# Altium PCB RSD_M1_LED_TURN_RIGHT_V2.PcbDoc (part 1 of 2)
Units mm, origin at the board's own origin, x right, y up, seen from the top; angles counter-clockwise.
Board outline 79.22 x 29.59 mm, 2 copper layers (Top Layer, Bottom Layer), stack 0.871 mm thick; 29 components, 45 nets, 68 pads, 25 vias.
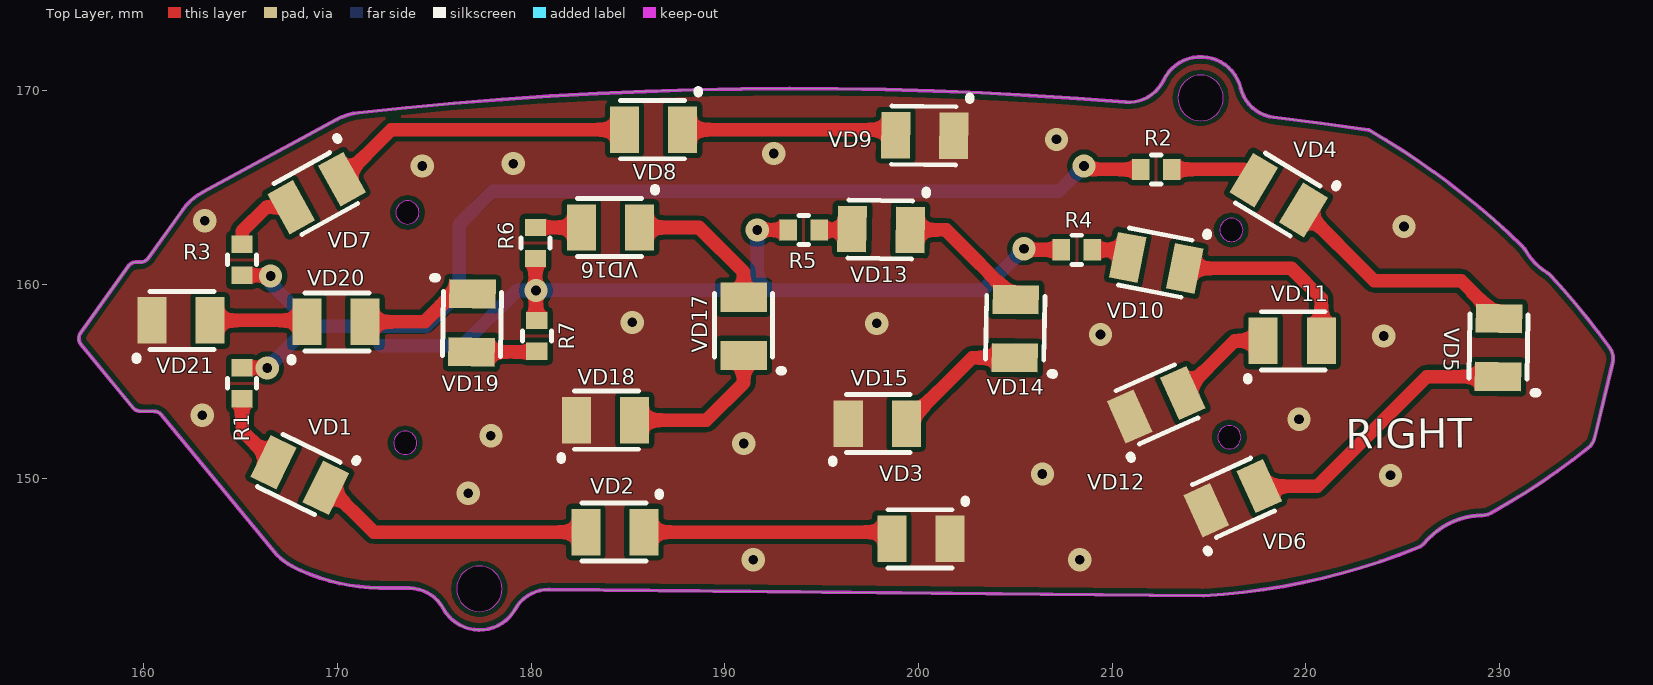
[diagram p0: Top Layer view]
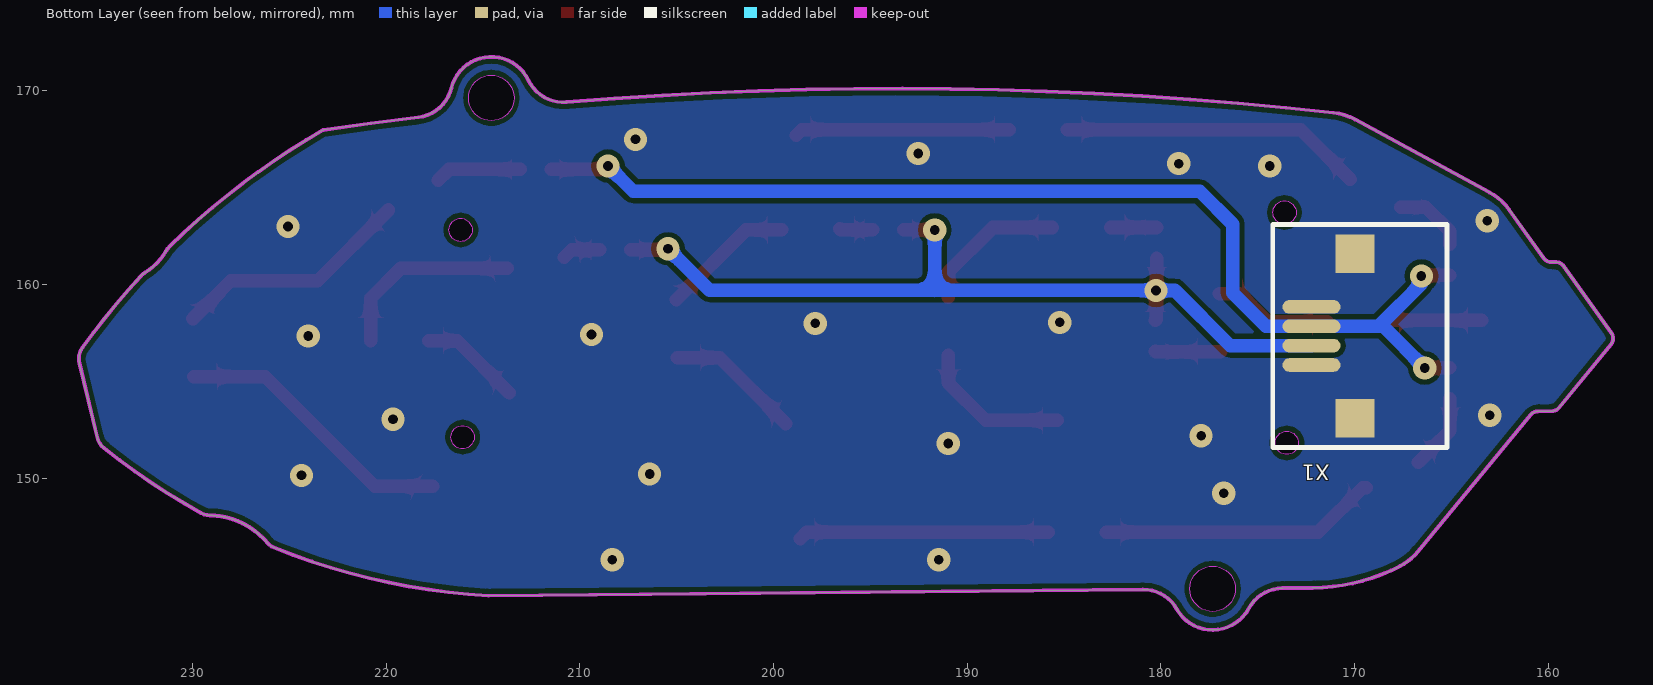
[diagram p1: Bottom Layer view, seen from below]
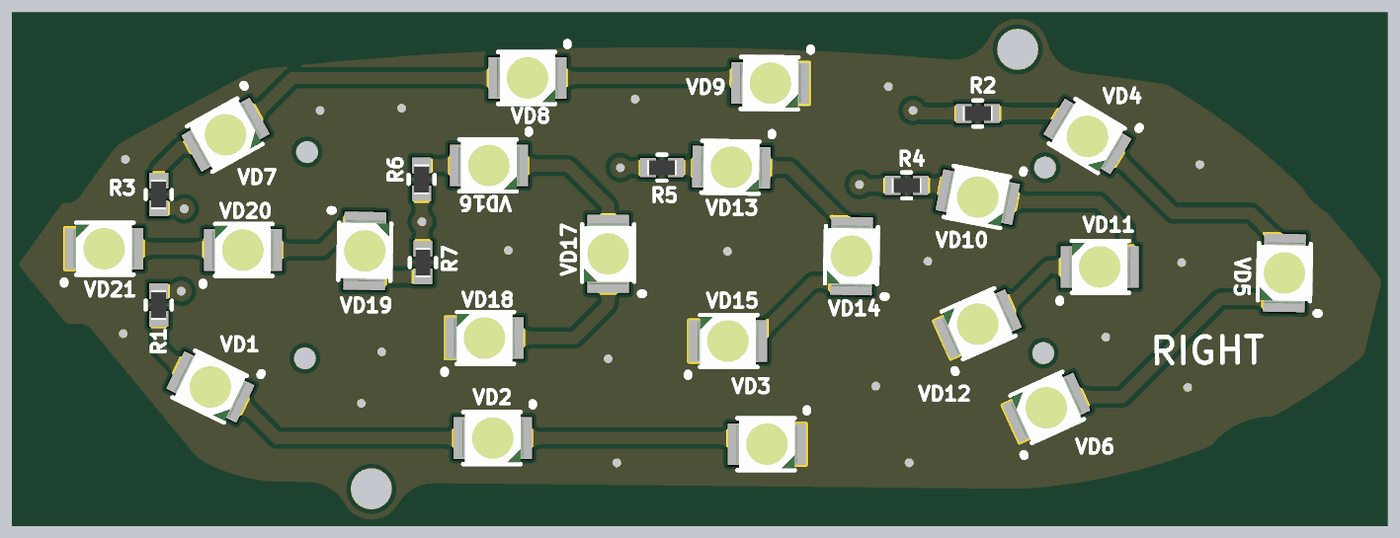
[diagram p3: 3D render of the assembled board from above, using the file's embedded part models]

## Layer stack, top to bottom
Top Solder: solder mask 0.0102, Solder Resist, Dk 3.5
Top Layer: signal copper 0.0356
Dielectric 1: dielectric 0.8, FR-4, Dk 4.8
Bottom Layer: signal copper 0.0356
Bottom Solder: solder mask 0.0102, Solder Resist, Dk 3.5

## Board outline
897 vertices, not listed, extent 156.65,142.168 235.87,171.761
cut-out: 215.457,152.123 ccw(c216.057,152.123) 216.057,151.523 ccw(c216.057,152.123) 216.657,152.123 ccw(c216.057,152.123) 216.057,152.723 ccw(c216.057,152.123)
cut-out: 215.56,162.823 ccw(c216.16,162.823) 216.16,162.223 ccw(c216.16,162.823) 216.76,162.823 ccw(c216.16,162.823) 216.16,163.423 ccw(c216.16,162.823)
cut-out: 213.4,169.638 ccw(c214.575,169.638) 214.575,168.463 ccw(c214.575,169.638) 215.75,169.638 ccw(c214.575,169.638) 214.575,170.813 ccw(c214.575,169.638)
cut-out: 176.156,144.293 ccw(c177.331,144.293) 177.331,143.118 ccw(c177.331,144.293) 178.506,144.293 ccw(c177.331,144.293) 177.331,145.468 ccw(c177.331,144.293)
cut-out: 172.903,151.83 ccw(c173.503,151.83) 173.503,151.23 ccw(c173.503,151.83) 174.103,151.83 ccw(c173.503,151.83) 173.503,152.43 ccw(c173.503,151.83)
cut-out: 173.016,163.729 ccw(c173.616,163.729) 173.616,163.129 ccw(c173.616,163.729) 174.216,163.729 ccw(c173.616,163.729) 173.616,164.329 ccw(c173.616,163.729)

## Design rules (kind name [scope] priority, off if disabled: settings)
Clearance [All] p1: gap=0.254 ignorepadtopadclearanceinfootprint=FALSE except(0: Arc-Hole Track-Hole SMDPad-Hole THPad-Hole Via-Hole Fill-Hole Poly-Hole Region-Hole Text-Hole)
PlaneConnect [All] p1: planeconnectstyle=Relief reliefexpansion=0.508 reliefentries=4 reliefconductorwidth=0.3 reliefairgap=0.254
PolygonConnect [All] p1: thpad.connectstyle=Relief thpad.reliefconductorwidth=0.5 thpad.reliefentries=4 thpad.polygonreliefangle="90 Angle" thpad.airgapwidth=0.3 smdpad.connectstyle=Direct smdpad.reliefconductorwidth=0.5 smdpad.reliefentries=4 smdpad.polygonreliefangle="90 Angle" smdpad.airgapwidth=0.3 via.connectstyle=Direct via.reliefconductorwidth=0.5 via.reliefentries=4 via.polygonreliefangle="90 Angle" via.airgapwidth=0.3
RoutingVias [All] p1: holewidth=0.711 width=1.27 viastyle="Through Hole" minholewidth=0.711 minwidth=1.27 maxholewidth=0.711 maxwidth=1.27
SolderMaskExpansion [All] p1: expansion=0.102
Width [All] p1: maxlimit=2 minlimit=0.254 preferedwidth=0.7
29 further rules are at their usual default settings.

## Components (designator, comment, footprint, x,y, rotation, side; value= is the part's Value field where it differs from the comment)
R1 "Resistor" Res0603 165.075,154.9 r90 top value="200 Om"
R2 "Resistor" Res0603 212.275,165.95 r180 top value="200 Om"
R3 "Resistor" Res0603 165.075,161.275 r270 top value="200 Om"
R4 "Resistor" Res0603 208.175,161.8 r180 top value="200 Om"
R5 "Resistor" Res0603 194.075,162.825 r180 top value="200 Om"
R6 "Resistor" Res0603 180.225,162.15 r270 top value="200 Om"
R7 "Resistor" Res0603 180.3,157.35 r90 top value="200 Om"
VD1 "LED" 3528_LED 168.05,150.175 r334 top value=WHITE
VD2 "LED" 3528_LED 184.325,147.225 r0 top value=WHITE
VD3 "LED" 3528_LED 200.125,146.875 r0 top value=WHITE
VD4 "LED" 3528_LED 218.6,164.625 r329 top value=WHITE
VD5 "LED" 3528_LED 229.95,156.75 r269 top value=WHITE
VD6 "LED" 3528_LED 216.225,148.975 r204.5 top value=WHITE
VD7 "LED" 3528_LED 168.925,164.725 r29 top value=WHITE
VD8 "LED" 3528_LED 186.325,168 r0 top value=WHITE
VD9 "LED" 3528_LED 200.325,167.7 r359.5 top value=WHITE
VD10 "LED" 3528_LED 212.275,161.125 r349 top value=YELLOW
VD11 "LED" 3528_LED 219.3,157.1 r180 top value=YELLOW
VD12 "LED" 3528_LED 212.275,153.8 r204 top value=YELLOW
VD13 "LED" 3528_LED 198.075,162.85 r359 top value=YELLOW
VD14 "LED" 3528_LED 204.999,157.725 r269 top value=YELLOW
VD15 "LED" 3528_LED 197.875,152.825 r180 top value=YELLOW
VD16 "LED" 3528_LED 184.1,162.95 r0 top value=YELLOW
VD17 "LED" 3528_LED 190.975,157.85 r270 top value=YELLOW
VD18 "LED" 3528_LED 183.85,153 r180 top value=YELLOW
VD19 "LED" 3528_LED 176.95,158.025 r89 top value=YELLOW
VD20 "LED" 3528_LED 169.925,158.075 r180 top value=YELLOW
VD21 "LED" 3528_LED 161.925,158.15 r180 top value=YELLOW
X1 "FPC_connector_4_1" FPC_4_1 169.225,157.35 r90 bottom value=0522070433

## Footprints (in the part's own frame and the unit in brackets; to place one, negate y for a bottom-side part, rotate by r counter-clockwise, add the part's x,y. Pads: shape width x height; smd on the part's side, far side on the other; paste and mask are expansions set on the pad)
3528_LED [mm]
  rect 1.5x2.4 smd: 1(1.5,0) 2(-1.5,0)
  silkscreen extent -1.7,-1.5 2.3,2, body extent -1.75,-1.4 1.75,1.4, height 1.9
FPC_4_1 [mm]
  rect 2x2 smd: 0(-4.25,0.75) 0(4.25,0.75)
  oval 0.7x3 smd: 1(-1.5,3) 2(-0.5,3) 3(0.5,3) 4(1.5,3)
  silkscreen extent -5.75,-4 5.75,5, body extent -5.15,-3.8 5.15,3.8, height 2.7
Res0603 [mm]
  rect 0.9x1.1 smd: 1(-0.8,0) 2(0.8,0)
  silkscreen extent -0.25,-0.75 0.25,0.75, body extent -0.85,-0.43 0.85,0.43, height 0.5

## Part data
X1: 1=GND, 2=GABARIT, 3=TURN, 4=GND

## Free pads (board coordinates)
  round 0 hole 1.25: 5(173.5,151.825) 5(173.625,163.725) 5(216.05,152.125) 5(216.15,162.825)
  round 0 hole 2.35: 5(177.325,144.3) 5(214.575,169.65)

## Via types
v1: diameter 1.2, hole 0.5, Top Layer to Bottom Layer, tented both sides, 25 vias

## Nets (pads, with @x,y where several pads share a name; then routed paths per layer and width w, separated by ;. In a path a pad name is that pad's centre, name@x,y a point inside that pad or via, vN(x,y) a via of type N, cw(c..) or ccw(c..) an arc to the next point about the centre after c; other vN are vias at no path point)
GABARIT: R1.2 R2.2 R3.2 X1.3 | length 57.9
  Top Layer w0.7: R1.2@165.075,155.7 v1(166.375,155.7) ; R3.2@165.075,160.475 v1@166.55,160.475 ; v1(208.55,166.125) 208.725,165.95 R2.2@211.475,165.95
  Bottom Layer w0.7: v1(166.375,155.7) 168.525,157.85 ; v1(166.55,160.45) 166.55,160.05 168.637,157.962 168.525,157.85 ; v1(208.55,166.125) 207.25,164.825 178,164.825 176.3,163.125 176.3,159.575 174.575,157.85 X1.3@172.225,157.85 168.525,157.85
GND: VD3.1 VD6.1 VD9.1 VD12.1 VD15.1 VD18.1 VD21.1 X1.0 X1.1 X1.4
  other v1: 191.475,145.8 208.325,145.8 176.75,149.225 224.375,150.15 206.4,150.225 190.975,151.8 177.925,152.2 219.65,153.05 163.025,153.25 224.025,157.35 209.4,157.425 197.85,158 185.225,158.05 225.075,163 163.15,163.3 174.375,166.125 179.075,166.25 192.525,166.775 207.125,167.5
NetR1_1: R1.1 VD1.2 | length 3.9
  Top Layer w0.7: R1.1@165.075,154.1 165.075,152.459 VD1.2@166.702,150.833
NetR2_1: R2.1 VD4.2 | length 4.5
  Top Layer w0.7: R2.1@213.075,165.95 216.762,165.95 VD4.2@217.314,165.398
NetR3_1: R3.1 VD7.2 | length 3.7
  Top Layer w0.7: R3.1@165.075,162.075 165.075,162.75 166.323,163.998 VD7.2@167.613,163.998
NetR4_1: R4.1 VD10.2 | length 2
  Top Layer w0.7: R4.1@208.975,161.8 210.414,161.8 VD10.2@210.803,161.411
NetR5_1: R5.1 VD13.2 | length 1.7
  Top Layer w0.7: R5.1@194.875,162.825 196.524,162.825 VD13.2@196.575,162.876
NetR6_1: R6.1 VD16.2 | length 2.4
  Top Layer w0.7: R6.1@180.225,162.95 VD16.2@182.6,162.95
NetR7_1: R7.1 VD19.2 | length 3.4
  Top Layer w0.7: VD19.2@176.924,156.525 180.275,156.525 R7.1@180.3,156.55
NetR8_1: 
NetR9_1: 
NetR10_1: 
NetR11_1: 
NetR12_1: 
NetR13_1: 
NetR14_1: 
NetVD1_1: VD1.1 VD2.2 | length 14.4
  Top Layer w0.7: VD1.1@169.398,149.517 169.583,149.517 171.875,147.225 VD2.2@182.825,147.225
NetVD2_1: VD2.1 VD3.2 | length 12.9
  Top Layer w0.7: VD2.1@185.825,147.225 198.275,147.225 VD3.2@198.625,146.875
NetVD4_1: VD4.1 VD5.2 | length 12.4
  Top Layer w0.7: VD4.1@219.886,163.852 223.538,160.2 228.026,160.2 VD5.2@229.976,158.25
NetVD5_1: VD5.1 VD6.2 | length 14.7
  Top Layer w0.7: VD6.2@217.59,149.597 220.597,149.597 226.25,155.25 VD5.1@229.924,155.25
NetVD7_1: VD7.1 VD8.2 | length 15.6
  Top Layer w0.7: VD7.1@170.237,165.452 172.785,168 VD8.2@184.825,168
NetVD8_1: VD8.1 VD9.2 | length 11.1
  Top Layer w0.7: VD8.1@187.825,168 198.538,168 VD9.2@198.825,167.713
NetVD10_1: VD10.1 VD11.2 | length 9.9
  Top Layer w0.7: VD10.1@213.747,160.839 219.261,160.839 220.8,159.3 VD11.2@220.8,157.1
NetVD11_1: VD11.1 VD12.2 | length 5.3
  Top Layer w0.7: VD12.2@213.645,154.41 216.335,157.1 VD11.1@217.8,157.1
NetVD13_1: VD13.1 VD14.2 | length 6.9
  Top Layer w0.7: VD13.1@199.575,162.824 201.426,162.824 VD14.2@205.025,159.225
NetVD14_1: VD14.1 VD15.2 | length 7
  Top Layer w0.7: VD15.2@199.375,152.825 202.775,156.225 VD14.1@204.973,156.225
NetVD16_1: VD16.1 VD17.2 | length 7.6
  Top Layer w0.7: VD16.1@185.6,162.95 188.675,162.95 190.975,160.65 VD17.2@190.975,159.35
NetVD17_1: VD17.1 VD18.2 | length 7.8
  Top Layer w0.7: VD18.2@185.35,153 189.05,153 190.975,154.925 VD17.1@190.975,156.35
NetVD19_1: VD19.1 VD20.2 | length 6.2
  Top Layer w0.7: VD20.2@171.425,158.075 174.5,158.075 175.95,159.525 VD19.1@176.976,159.525
NetVD20_1: VD20.1 VD21.2 | length 5
  Top Layer w0.7: VD21.2@163.425,158.15 168.35,158.15 VD20.1@168.425,158.075
NetVD22_1: 
NetVD23_1: 
NetVD25_1: 
NetVD26_1: 
NetVD28_1: 
NetVD29_1: 
NetVD31_1: 
NetVD32_1: 
NetVD34_1: 
NetVD35_1: 
NetVD37_1: 
NetVD38_1: 
NetVD40_1: 
NetVD41_1: 
TURN_SIGNAL: R4.2 R5.2 R6.2 R7.2 X1.2 | length 45.2
  Top Layer w0.7: R6.2@180.225,161.35 180.225,159.725 v1(180.25,159.7) 180.25,158.2 R7.2@180.3,158.15 ; v1(191.675,162.825) R5.2@193.275,162.825 ; v1(205.45,161.85) 205.5,161.8 R4.2@207.375,161.8
  Bottom Layer w0.7: X1.2@172.225,156.85 176.425,156.85 179.275,159.7 v1(180.25,159.7) 191.675,159.7 ; v1(191.675,162.825) 191.675,159.7 ; v1(205.45,161.85) 203.3,159.7 191.675,159.7

## Polygon pours and split planes (outlines as drawn)
GND on Bottom Layer "Top Layer, Top-No Net" (solid, pour order 17): 330 vertices, not listed, extent 156.6,141.994 236.121,171.887
GND on Top Layer "Top Layer, Top-No Net" (solid, pour order 15): 330 vertices, not listed, extent 156.5,142.044 236.021,171.937

## Keep-outs
Keep-Out Layer:
  lines w0.2: 156.743,157.517 cw(c156.866,157.43) 156.744,157.518 ; 156.743,157.517 cw(c156.865,157.429) 156.743,157.518 ; 156.743,157.517 ccw(c157.149,157.226) 156.762,156.91 ; 156.743,157.517 156.744,157.518 ; 156.744,157.518 159.196,160.951 ; 156.743,157.518 156.743,157.518 ; 156.743,157.518 156.744,157.518 ; 156.762,156.91 ccw(c156.878,157.005) 156.763,156.909 ; 156.763,156.909 ccw(c156.879,157.004) 156.763,156.908 ; 156.762,156.91 ccw(c157.149,157.226) 156.763,156.908 ; 156.763,156.909 ccw(c156.878,157.005) 156.763,156.909 ; 156.763,156.909 ccw(c156.878,157.005) 156.763,156.908 ; 156.762,156.91 156.762,156.91 ; 156.762,156.91 156.763,156.909 ; 156.763,156.908 ccw(c156.878,157.005) 156.763,156.908 ; 156.763,156.908 ccw(c156.879,157.004) 156.764,156.907 159.45,153.644 ; 156.763,156.908 156.763,156.908 ; 156.763,156.908 156.763,156.908 ; 159.196,160.951 cw(c159.319,160.864) 159.197,160.952 ; 159.196,160.951 159.197,160.952 ; 159.196,160.951 159.197,160.952 ; 159.197,160.952 cw(c159.321,160.866) 159.198,160.953 ; 159.197,160.952 ccw(c159.321,160.866) 159.197,160.952 ; 159.197,160.952 cw(c159.319,160.864) 159.198,160.953 ; 159.197,160.952 159.197,160.952 ; 159.197,160.952 159.198,160.954 ; 159.198,160.954 cw(c159.605,160.663) 159.2,160.956 ; 159.198,160.954 ccw(c159.321,160.866) 159.198,160.953 ; 159.198,160.953 ccw(c159.321,160.866) 159.198,160.953 ; 159.198,160.954 cw(c159.32,160.866) 159.2,160.956 ; 159.198,160.954 ccw(c159.319,160.864) 159.198,160.953 ; 159.198,160.954 159.2,160.956 ; 159.2,160.956 cw(c159.605,160.663) 159.608,161.163 ; 159.45,153.643 ccw(c159.566,153.739) 159.45,153.643 ; 159.45,153.644 ccw(c159.566,153.739) 159.45,153.644 ; 159.45,153.644 ccw(c159.567,153.738) 159.45,153.643 ; 159.45,153.643 ccw(c159.567,153.738) 159.451,153.643 ; 159.45,153.644 159.45,153.643 ; 159.45,153.644 159.451,153.643 ; 159.45,153.644 159.45,153.644 ; 159.451,153.643 cw(c159.567,153.738) 159.45,153.643 ; 159.451,153.643 cw(c159.566,153.739) 159.451,153.643 ; 159.451,153.643 ccw(c159.567,153.738) 159.451,153.643 ; 159.451,153.643 ccw(c159.837,153.96) 159.452,153.642 ; 159.452,153.642 ccw(c159.837,153.96) 159.83,153.46 ; 159.608,161.163 cw(c159.608,161.012) 159.61,161.163 ; 159.608,161.163 cw(c159.605,160.663) 159.61,161.163 ; 159.608,161.163 159.611,161.163 ; 159.61,161.163 ccw(c159.61,161.012) 159.61,161.163 ; 159.61,161.163 cw(c159.61,161.012) 159.611,161.163 ; 159.61,161.163 cw(c159.608,161.012) 159.611,161.163 ; 159.61,161.163 cw(c159.608,161.012) 159.611,161.163 ; 159.61,161.163 159.611,161.163 ; 159.61,161.163 159.61,161.163 ; 159.61,161.163 159.61,161.163 ; 159.611,161.163 ccw(c159.61,161.012) 159.611,161.163 ; 159.611,161.163 ccw(c159.608,161.012) 159.611,161.163 ; 159.611,161.163 cw(c159.61,161.012) 159.612,161.163 ; 159.611,161.163 159.612,161.163 ; 159.611,161.163 159.611,161.163 ; 159.611,161.163 159.612,161.163 ; 159.612,161.163 159.82,161.161 cw(c159.82,161.01) 159.822,161.161 ; 159.822,161.161 ccw(c159.826,161.661) 159.823,161.161 ; 159.822,161.161 ccw(c159.82,161.01) 159.822,161.161 ; 159.822,161.161 cw(c159.822,161.01) 159.823,161.161 ; 159.822,161.161 ccw(c159.826,161.661) 159.822,161.161 ; 159.822,161.161 ccw(c159.826,161.661) 159.822,161.161 ; 159.822,161.161 ccw(c159.822,161.01) 159.821,161.161 ; 159.822,161.161 ccw(c159.822,161.01) 159.822,161.161 ; 159.822,161.161 159.823,161.161 ; 159.822,161.161 159.822,161.161 ; 159.821,161.161 159.822,161.161 ; 159.823,161.161 ccw(c159.826,161.661) 160.233,161.37 ; 159.823,161.161 ccw(c159.826,161.661) 159.823,161.161 ; 159.823,161.161 ccw(c159.822,161.01) 159.823,161.161 ; 159.83,153.46 ccw(c159.837,153.96) 159.832,153.46 ; 159.83,153.46 ccw(c159.834,153.611) 159.832,153.46 ; 159.83,153.46 159.832,153.46 ; 159.832,153.46 ccw(c159.836,153.611) 159.832,153.46 ; 159.832,153.46 ccw(c159.834,153.611) 159.832,153.46 ; 159.832,153.46 ccw(c159.834,153.611) 159.832,153.46 ; 159.832,153.46 ccw(c159.837,153.96) 159.832,153.46 ; 159.832,153.46 ccw(c159.834,153.611) 159.834,153.46 ; 159.832,153.46 ccw(c159.836,153.611) 159.834,153.46 ; 159.832,153.46 159.832,153.46 ; 159.832,153.46 159.832,153.46 ; 159.832,153.46 159.832,153.46 ; 159.832,153.46 159.834,153.46 ; 159.834,153.46 ccw(c159.834,153.611) 159.834,153.46 ; 159.834,153.46 ccw(c159.836,153.611) 159.834,153.46 ; 159.834,153.46 159.834,153.46 ; 159.834,153.46 159.834,153.46 ; 159.834,153.46 ccw(c159.836,153.611) 159.835,153.46 ; 159.834,153.46 159.834,153.46 ; 159.834,153.46 159.835,153.46 ; 159.834,153.46 159.835,153.46 ; 159.835,153.46 160.54,153.454 ; 160.234,161.371 ccw(c160.356,161.283) 160.233,161.37 ; 160.234,161.371 162.021,163.872 ; 160.234,161.37 160.234,161.371 ; 160.233,161.37 160.234,161.37 ; 160.233,161.37 160.233,161.37 ; 160.233,161.37 160.234,161.371 ; 160.54,153.454 ccw(c160.542,153.604) 160.54,153.454 ; 160.54,153.454 160.54,153.454 ; 160.54,153.454 160.541,153.454 ; 160.54,153.454 ccw(c160.542,153.604) 160.541,153.454 ; 160.541,153.454 ccw(c160.536,152.954) 160.541,153.454 ; 160.54,153.454 ccw(c160.542,153.604) 160.541,153.454 ; 160.54,153.454 ccw(c160.542,153.604) 160.54,153.454 ; 160.541,153.454 ccw(c160.542,153.604) 160.542,153.454 ; 160.54,153.454 160.54,153.454 ; 160.54,153.454 160.54,153.454 ; 160.541,153.454 160.541,153.454 ; 160.54,153.454 160.54,153.454 ; 160.542,153.454 cw(c160.536,152.954) 160.922,153.272 ; 160.542,153.454 160.542,153.454 ; 160.922,153.271 ccw(c160.536,152.954) 160.922,153.272 ; 160.922,153.271 ccw(c161.038,153.367) 160.923,153.271 ; 160.922,153.271 cw(c161.038,153.367) 160.922,153.272 ; 160.922,153.271 160.922,153.271 160.923,153.271 ; 160.922,153.271 160.922,153.271 ; 160.922,153.271 160.922,153.272 ; 160.922,153.271 160.923,153.271 ; 160.923,153.271 166.723,146.222 ; 162.021,163.872 cw(c162.144,163.785) 162.021,163.872 ; 162.021,163.872 162.021,163.872 ; 162.021,163.872 162.021,163.873 ; 162.021,163.873 cw(c162.144,163.786) 162.022,163.873 ; 162.021,163.873 cw(c162.144,163.785) 162.022,163.873 ; 162.021,163.873 cw(c164.462,162.128) 162.022,163.873 ; 162.021,163.873 ccw(c162.144,163.785) 162.021,163.872 ; 162.021,163.872 ccw(c162.144,163.785) 162.021,163.872 ; 162.021,163.872 cw(c162.144,163.786) 162.021,163.873 ; 162.021,163.873 162.021,163.873 ; 162.021,163.872 162.021,163.873 ; 162.021,163.872 162.022,163.873 ; 162.021,163.872 162.021,163.872 ; 162.021,163.872 162.021,163.872 ; 162.021,163.872 162.021,163.872 ; 162.021,163.873 162.021,163.873 ; 162.022,163.874 cw(c164.462,162.128) 162.023,163.874 ; 162.022,163.874 ccw(c164.462,162.128) 162.022,163.873 ; 162.022,163.873 ccw(c162.144,163.785) 162.022,163.873 ; 162.022,163.873 cw(c162.144,163.786) 162.023,163.874 ; 162.022,163.873 ccw(c164.462,162.128) 162.022,163.873 ; 162.022,163.873 ccw(c162.144,163.786) 162.022,163.873 ; 162.022,163.873 ccw(c162.144,163.785) 162.022,163.873 ; 162.022,163.873 ccw(c162.144,163.786) 162.021,163.873 ; 162.022,163.873 162.022,163.873 ; 162.022,163.873 162.023,163.874 ; 162.022,163.873 162.022,163.873 ; 162.022,163.873 162.022,163.873 ; 162.022,163.873 162.022,163.873 ; 162.023,163.874 cw(c164.462,162.128) 163.032,164.765 ; 163.033,164.766 cw(c163.106,164.634) 163.033,164.766 ; 163.033,164.766 cw(c163.105,164.634) 163.034,164.766 ; 163.033,164.766 ccw(c163.105,164.634) 163.032,164.765 ; 163.033,164.766 ccw(c164.462,162.128) 163.032,164.765 ; 163.033,164.766 163.033,164.766 ; 163.033,164.766 163.034,164.767 ; 163.033,164.766 163.033,164.766 ; 163.032,164.765 163.034,164.767 ; 163.034,164.766 cw(c163.106,164.634) 163.034,164.767 ; 163.034,164.766 ccw(c163.106,164.634) 163.033,164.766 ; 163.034,164.766 cw(c163.105,164.634) 163.034,164.767 ; 163.033,164.766 cw(c163.105,164.634) 163.034,164.767 ; 163.034,164.767 169.984,168.533 cw(c170.056,168.401) 169.985,168.533 ; 163.034,164.767 163.034,164.767 ; 166.723,146.222 ccw(c166.84,146.317) 166.724,146.221 ; 166.723,146.222 166.724,146.222 166.724,146.221 ; 166.723,146.222 166.724,146.221 ; 166.725,146.22 ccw(c166.841,146.316) 166.725,146.22 ; 166.725,146.22 ccw(c169.04,148.128) 166.725,146.22 ; 166.725,146.22 cw(c166.841,146.316) 166.724,146.221 ; 166.725,146.22 cw(c166.84,146.317) 166.724,146.221 ; 166.725,146.22 cw(c169.04,148.128) 166.724,146.221 ; 166.725,146.22 ccw(c169.04,148.128) 167.659,145.464 ; 166.725,146.22 166.724,146.221 ; 166.725,146.22 166.725,146.22 ; 166.725,146.22 166.724,146.221 ; 166.724,146.221 ccw(c166.84,146.317) 166.724,146.221 ; 166.724,146.221 ccw(c166.84,146.317) 166.724,146.221 ; 166.724,146.221 ccw(c166.841,146.316) 166.724,146.221 ; 166.724,146.221 ccw(c166.841,146.316) 166.724,146.221 ; 166.724,146.221 166.724,146.221 ; 166.724,146.221 166.724,146.221 ; 166.724,146.221 166.724,146.221 ; 166.724,146.221 166.724,146.221 ; 167.659,145.465 ccw(c167.728,145.598) 167.659,145.464 ; 167.659,145.465 ccw(c167.73,145.597) 167.659,145.464 ; 167.659,145.464 ccw(c167.73,145.597) 167.66,145.464 ccw(c172.263,154.342) 172.167,144.342 ccw(c172.168,144.492) 172.167,144.342 ; 169.986,168.534 cw(c171.415,165.896) 169.987,168.534 cw(c171.415,165.896) 171.083,168.878 ; 169.986,168.534 ccw(c170.056,168.401) 169.986,168.534 ; 169.986,168.534 ccw(c170.056,168.401) 169.985,168.533 ; 171.083,168.878 cw(c171.415,165.896) 171.084,168.878 ; 171.083,168.878 cw(c171.1,168.728) 171.084,168.878 ; 171.083,168.878 171.084,168.878 ; 171.084,168.878 cw(c171.1,168.728) 171.084,168.878 ; 171.084,168.878 cw(c171.101,168.728) 171.084,168.878 ; 171.085,168.878 cw(c193.694,-34.872) 210.686,169.423 cw(c210.673,169.273) 210.686,169.423 ; 171.085,168.878 ccw(c171.101,168.728) 171.084,168.878 ; 171.084,168.878 ccw(c171.101,168.728) 171.084,168.878 ; 171.084,168.878 ccw(c171.101,168.728) 171.084,168.878 ; 172.167,144.342 ccw(c172.169,144.492) 172.167,144.342 ; 172.167,144.342 ccw(c172.168,144.492) 172.167,144.342 ; 172.167,144.342 ccw(c172.169,144.492) 172.167,144.342 ; 172.167,144.342 ccw(c172.168,144.492) 172.167,144.342 ; 172.168,144.342 ccw(c172.169,144.492) 172.168,144.342 ; 172.168,144.342 ccw(c172.169,144.492) 172.169,144.342 ; 172.167,144.342 ccw(c172.169,144.492) 172.168,144.342 ; 172.167,144.342 ccw(c172.168,144.492) 172.168,144.342 ; 172.167,144.342 172.167,144.342 ; 172.167,144.342 172.168,144.342 ; 172.168,144.342 172.168,144.342 ; 172.168,144.342 172.169,144.342 ; 172.168,144.342 172.168,144.342 ; 172.168,144.342 172.169,144.342 ; 172.169,144.342 173.722,144.327 ccw(c173.724,144.478) 173.723,144.327 ; 173.723,144.327 ccw(c173.725,144.478) 173.724,144.327 ; 173.724,144.327 cw(c173.704,142.327) 173.724,144.327 ; 173.724,144.327 ccw(c173.704,142.327) 173.723,144.327 ; 173.723,144.327 ccw(c173.724,144.478) 173.724,144.327 ; 173.724,144.327 ccw(c173.724,144.478) 173.725,144.327 ; 173.723,144.327 173.723,144.327 ; 173.724,144.327 ccw(c173.725,144.478) 173.725,144.327 ; 173.725,144.327 ccw(c173.704,142.327) 173.724,144.327 ; 173.725,144.327 cw(c173.704,142.327) 175.462,143.281 cw(c173.704,142.327) 175.463,143.28 ; 173.725,144.327 173.725,144.327 ; 173.725,144.327 173.725,144.327 ; 173.725,144.327 173.725,144.327 ; 175.463,143.28 cw(c173.704,142.327) 175.463,143.28 ; 175.463,143.28 ccw(c175.596,143.35) 175.463,143.28 ; 175.463,143.28 175.463,143.28 ; 175.463,143.279 cw(c175.596,143.35) 175.463,143.28 ; 175.463,143.279 ccw(c177.331,144.293) 179.179,143.244 ccw(c179.049,143.319) 179.18,143.245 ; 175.463,143.279 175.463,143.279 ; 175.463,143.28 175.463,143.28 ; 179.18,143.245 cw(c180.919,142.258) 180.938,144.258 ; 179.18,143.245 179.18,143.245 ; 180.938,144.258 ccw(c180.919,142.258) 180.938,144.258 ; 180.938,144.258 ccw(c180.919,142.258) 180.938,144.258 ; 180.938,144.258 ccw(c180.94,144.409) 180.939,144.258 ; 180.938,144.258 ccw(c180.941,144.409) 180.94,144.258 ; 180.938,144.258 ccw(c180.94,144.409) 180.938,144.258 ; 180.938,144.258 ccw(c180.941,144.409) 180.938,144.258 ; 180.938,144.258 ccw(c180.941,144.409) 180.938,144.258 ; 180.938,144.258 180.938,144.258 ; 180.938,144.258 180.938,144.258 ; 180.938,144.258 180.939,144.258 ; 180.939,144.258 ccw(c180.94,144.409) 180.94,144.258 ; 180.94,144.258 180.94,144.258 ; 180.94,144.258 180.94,144.258 ; 180.939,144.258 180.94,144.258 ; 180.94,144.258 214.724,143.936 ; 210.687,169.423 ccw(c210.852,171.416) 210.687,169.423 ccw(c210.852,171.416) 212.656,170.552 ; 210.687,169.423 ccw(c210.673,169.273) 210.686,169.423 ; 212.656,170.552 cw(c212.793,170.489) 212.657,170.554 ; 212.656,170.553 ccw(c210.852,171.416) 212.657,170.554 ; 212.656,170.552 ccw(c210.852,171.416) 212.656,170.553 ; 212.656,170.553 ccw(c212.792,170.488) 212.656,170.552 ; 212.656,170.553 cw(c212.792,170.488) 212.657,170.554 ; 212.656,170.552 212.656,170.552 ; 212.656,170.552 212.657,170.554 ; 212.656,170.552 212.657,170.554 ; 212.657,170.554 cw(c212.793,170.489) 212.657,170.554 ; 212.657,170.554 cw(c212.792,170.488) 212.657,170.554 ; 212.657,170.554 cw(c212.793,170.489) 212.658,170.556 ; 212.657,170.554 212.657,170.554 ; 212.657,170.554 212.658,170.556 ; 212.657,170.554 cw(c214.575,169.638) 212.658,170.556 ; 212.657,170.554 ccw(c212.792,170.488) 212.657,170.554 ; 212.657,170.554 ccw(c214.575,169.638) 212.657,170.554 ; 212.657,170.554 212.657,170.554 ; 212.658,170.556 cw(c214.575,169.638) 216.637,170.15 ; 214.724,143.936 ccw(c214.726,144.086) 214.734,143.936 ccw(c212.687,178.876) 225.771,146.414 ccw(c212.687,178.876) 225.772,146.414 ; 214.724,143.936 214.724,143.936 ; 214.724,143.936 214.724,143.936 ; 216.637,170.15 cw(c216.491,170.113) 216.638,170.147 ; 216.637,170.15 cw(c214.575,169.638) 216.637,170.149 ; 216.637,170.15 216.637,170.149 ; 216.638,170.147 ccw(c218.579,170.627) 218.337,168.642 cw(c218.32,168.492) 218.338,168.642 218.339,168.642 ; 216.638,170.147 ccw(c218.579,170.627) 216.638,170.147 ; 216.638,170.148 ccw(c218.579,170.627) 216.638,170.147 ; 216.638,170.148 cw(c218.579,170.627) 216.638,170.148 ; 216.638,170.147 ccw(c216.492,170.112) 216.638,170.148 ; 216.638,170.148 ccw(c216.492,170.112) 216.638,170.148 ; 216.638,170.148 216.638,170.148 ; 218.34,168.641 cw(c193.694,-34.872) 223.231,167.989 cw(c223.209,167.841) 223.284,167.971 cw(c203.238,133.356) 231.185,161.974 ; 218.34,168.641 ccw(c218.321,168.492) 218.339,168.642 ; 218.34,168.641 218.34,168.641 ; 225.772,146.414 ccw(c225.398,147.343) 225.773,146.414 ccw(c225.398,147.343) 226.157,146.69 ; 225.772,146.414 225.772,146.414 ; 226.157,146.69 ccw(c226.044,146.79) 226.157,146.69 ; 226.157,146.69 ccw(c226.043,146.788) 226.159,146.692 ; 226.157,146.69 226.157,146.69 ; 226.159,146.692 ccw(c226.047,146.793) 226.159,146.692 ; 226.159,146.692 ccw(c226.047,146.793) 226.159,146.693 ; 226.159,146.693 ccw(c226.047,146.793) 226.159,146.693 ; 226.159,146.693 ccw(c226.047,146.793) 226.159,146.693 ; 226.159,146.692 226.159,146.692 ; 226.159,146.693 226.267,146.813 ccw(c226.155,146.913) 226.267,146.813 226.268,146.814 ccw(c226.156,146.914) 226.269,146.815 ; 226.269,146.815 226.269,146.815 ; 226.269,146.815 226.292,146.84 ; 226.292,146.84 ccw(c226.184,146.944) 226.292,146.84 ; 226.292,146.84 ccw(c226.184,146.944) 226.292,146.84 ; 226.292,146.84 ccw(c226.184,146.944) 226.292,146.84 ; 226.292,146.84 226.315,146.864 ; 226.315,146.864 ccw(c226.206,146.968) 226.315,146.864 ; 226.315,146.864 ccw(c226.206,146.968) 226.315,146.864 ; 226.315,146.864 ccw(c226.207,146.969) 226.315,146.864 ; 226.315,146.864 226.339,146.888 226.362,146.912 ; 226.362,146.912 ccw(c226.257,147.019) 226.363,146.913 ; 226.363,146.913 226.363,146.913 226.386,146.935 ccw(c226.28,147.042) 226.386,146.936 ; 226.386,146.936 ccw(c226.28,147.042) 226.386,146.936 ; 226.386,146.936 ccw(c226.281,147.044) 226.386,146.936 ; 226.386,146.936 ccw(c226.281,147.043) 226.386,146.936 ; 226.386,146.936 ccw(c226.28,147.042) 226.386,146.936 ; 226.386,146.936 ccw(c226.281,147.043) 226.386,146.936 ; 226.386,146.936 ccw(c226.28,147.042) 226.386,146.936 ; 226.386,146.936 ccw(c226.281,147.044) 226.386,146.936 ; 226.386,146.936 226.386,146.936 ; 226.386,146.936 226.386,146.936 ; 226.386,146.936 226.386,146.936 ; 226.386,146.936 226.386,146.936 ; 226.386,146.936 226.41,146.959 ; 226.41,146.959 ccw(c226.305,147.067) 226.41,146.96 ; 226.41,146.959 ccw(c226.305,147.067) 226.41,146.959 ; 226.41,146.959 226.41,146.96 ; 226.41,146.959 226.41,146.96 ; 226.41,146.96 226.411,146.96 ; 226.411,146.96 226.434,146.983 ; 226.434,146.983 ccw(c226.33,147.091) 226.434,146.983 226.459,147.006 ; 226.434,146.983 226.434,146.983 ; 226.434,146.983 226.434,146.983 ; 226.459,147.006 ccw(c226.357,147.116) 226.459,147.007 226.483,147.028 226.483,147.029 ; 226.459,147.006 226.459,147.006 ; 226.483,147.029 ccw(c226.381,147.139) 226.483,147.029 ; 226.483,147.029 ccw(c226.381,147.139) 226.483,147.029 ; 226.483,147.029 ccw(c226.381,147.139) 226.483,147.029 ; 226.483,147.029 ccw(c226.381,147.139) 226.484,147.029 ; 226.483,147.029 ccw(c226.381,147.139) 226.483,147.029 ; 226.483,147.029 ccw(c226.382,147.14) 226.484,147.029 ; 226.483,147.029 226.483,147.029 ; 226.483,147.029 226.484,147.029 ; 226.484,147.029 ccw(c226.382,147.14) 226.484,147.029 ; 226.484,147.029 226.508,147.051 226.508,147.051 226.508,147.052 ; 226.508,147.052 ccw(c226.407,147.163) 226.508,147.052 ; 226.508,147.052 ccw(c226.407,147.163) 226.508,147.052 ; 226.508,147.052 ccw(c226.407,147.163) 226.508,147.052 ; 226.508,147.052 ccw(c226.406,147.162) 226.508,147.052 ; 226.508,147.052 ccw(c226.406,147.162) 226.508,147.052 ; 226.508,147.052 226.508,147.052 ; 226.508,147.052 226.533,147.074 226.558,147.096 ccw(c226.46,147.21) 226.559,147.097 226.559,147.097 226.583,147.118 ; 226.583,147.118 ccw(c226.486,147.233) 226.584,147.118 ; 226.584,147.118 ccw(c226.484,147.231) 226.584,147.118 ; 226.584,147.118 ccw(c226.484,147.231) 226.584,147.118 ; 226.584,147.118 ccw(c226.486,147.233) 226.584,147.119 ; 226.584,147.119 ccw(c226.485,147.232) 226.584,147.119 ; 226.583,147.118 226.583,147.118 ; 226.583,147.118 226.583,147.118 ; 226.584,147.119 226.584,147.119 ; 226.584,147.119 226.609,147.14 ccw(c226.512,147.255) 226.609,147.141 226.634,147.162 ccw(c226.537,147.277) 226.635,147.162 226.661,147.183 226.686,147.205 ; 226.686,147.205 ccw(c226.593,147.322) 226.687,147.205 ; 226.687,147.205 226.713,147.226 ; 226.713,147.226 ccw(c226.619,147.343) 226.713,147.226 ; 226.713,147.226 226.713,147.226 ; 226.713,147.226 226.739,147.246 ; 226.739,147.246 ccw(c226.647,147.366) 226.739,147.247 ; 226.739,147.246 226.739,147.246 ; 226.739,147.247 226.74,147.247 ; 226.74,147.247 226.765,147.267 ; 226.765,147.267 ccw(c226.673,147.386) 226.765,147.267 ; 226.765,147.267 ccw(c226.673,147.386) 226.766,147.267 ; 226.765,147.267 226.765,147.267 ; 226.765,147.267 226.765,147.267 ; 226.766,147.267 ccw(c226.673,147.386) 226.766,147.267 ; 226.766,147.267 226.766,147.267 ; 226.766,147.267 ccw(c226.675,147.387) 226.766,147.267 ; 226.766,147.267 226.792,147.287 ; 226.792,147.287 ccw(c226.701,147.407) 226.792,147.287 ; 226.792,147.287 ccw(c226.701,147.407) 226.792,147.287 ; 226.792,147.287 ccw(c226.701,147.407) 226.792,147.287 ; 226.792,147.287 ccw(c226.701,147.407) 226.792,147.287 ; 226.792,147.287 ccw(c226.702,147.408) 226.792,147.288 ; 226.792,147.287 ccw(c226.701,147.407) 226.792,147.288 ; 226.792,147.287 226.792,147.287 ; 226.792,147.287 226.819,147.307 ; 226.819,147.307 ccw(c226.73,147.429) 226.819,147.308 ; 226.819,147.308 ccw(c226.73,147.429) 226.819,147.308 ; 226.819,147.308 226.846,147.327 ; 226.846,147.327 ccw(c226.757,147.448) 226.846,147.327 ; 226.846,147.327 226.873,147.347 ; 226.873,147.347 ccw(c226.786,147.47) 226.873,147.347 ; 226.873,147.347 ccw(c226.785,147.469) 226.873,147.347 ; 226.873,147.347 226.873,147.347 ; 226.873,147.347 226.901,147.366 226.928,147.386 ; 226.928,147.386 ccw(c226.843,147.51) 226.928,147.386 226.928,147.386 ; 226.928,147.386 ccw(c226.843,147.51) 226.928,147.386 ; 226.928,147.386 ccw(c226.842,147.509) 226.928,147.386 ; 226.928,147.386 226.928,147.386 ; 226.928,147.386 226.956,147.405 ccw(c226.872,147.53) 226.956,147.405 226.983,147.423 ; 226.983,147.423 ccw(c226.899,147.548) 226.983,147.423 ; 226.983,147.423 ccw(c226.899,147.548) 226.983,147.423 ; 226.983,147.423 ccw(c226.899,147.548) 226.983,147.423 ; 226.983,147.423 ccw(c226.899,147.548) 226.984,147.424 ; 226.984,147.424 ccw(c226.9,147.549) 226.984,147.424 ; 226.984,147.424 ccw(c226.901,147.549) 226.984,147.424 ; 226.984,147.424 226.984,147.424 ; 226.984,147.424 227.011,147.442 ; 227.011,147.442 ccw(c226.928,147.567) 227.011,147.442 ; 227.011,147.442 ccw(c226.928,147.567) 227.011,147.442 ; 227.011,147.442 ccw(c226.928,147.567) 227.011,147.442 ; 227.011,147.442 ccw(c226.928,147.567) 227.011,147.442 ; 227.011,147.442 ccw(c226.928,147.567) 227.011,147.442 ; 227.011,147.442 227.011,147.442 ; 227.011,147.442 227.011,147.442 ; 227.011,147.442 227.011,147.442 ; 227.011,147.442 227.011,147.442 ; 227.011,147.442 227.039,147.46 ; 227.039,147.46 ccw(c226.957,147.586) 227.039,147.46 ; 227.039,147.46 ccw(c226.959,147.587) 227.039,147.46 ; 227.039,147.46 ccw(c226.959,147.587) 227.04,147.46 227.067,147.478 ; 227.039,147.46 227.039,147.46 ; 227.039,147.46 227.039,147.46 ; 227.067,147.478 ccw(c226.986,147.605) 227.067,147.478 ; 227.067,147.478 ccw(c226.986,147.605) 227.068,147.478 227.096,147.496 ; 227.067,147.478 227.067,147.478 ; 227.067,147.478 227.067,147.478 ; 227.096,147.496 ccw(c227.017,147.624) 227.096,147.496 227.096,147.496 ; 227.096,147.496 227.124,147.513 ; 227.124,147.513 ccw(c227.046,147.642) 227.124,147.513 ; 227.124,147.513 ccw(c227.046,147.642) 227.124,147.513 ; 227.124,147.513 227.124,147.513 ; 227.124,147.513 227.153,147.531 227.182,147.548 ; 227.182,147.548 ccw(c227.106,147.678) 227.182,147.548 ; 227.182,147.548 ccw(c227.106,147.678) 227.182,147.548 ; 227.182,147.548 227.182,147.548 ; 227.182,147.548 227.21,147.565 ; 227.21,147.565 ccw(c227.136,147.695) 227.211,147.565 ; 227.21,147.565 227.21,147.565 ; 227.211,147.565 227.239,147.581 ; 227.239,147.581 ccw(c227.164,147.711) 227.239,147.581 ; 227.239,147.581 227.239,147.581 ; 227.239,147.581 ccw(c227.166,147.712) 227.239,147.581 ; 227.239,147.581 ccw(c227.165,147.712) 227.239,147.581 ; 227.239,147.581 227.268,147.597 ; 227.268,147.597 ccw(c227.195,147.729) 227.268,147.597 227.268,147.597 ; 227.268,147.597 ccw(c227.196,147.729) 227.268,147.597 ; 227.268,147.597 ccw(c227.196,147.729) 227.269,147.598 ; 227.269,147.598 227.269,147.598 ; 227.269,147.598 227.297,147.613 ; 227.298,147.613 ccw(c227.226,147.746) 227.298,147.613 ; 227.297,147.613 227.298,147.613 ; 227.298,147.613 227.298,147.613 ; 227.298,147.613 ccw(c227.225,147.745) 227.298,147.613 ; 227.298,147.614 ccw(c227.226,147.746) 227.298,147.614 ; 227.298,147.613 227.298,147.614 ; 227.298,147.614 227.298,147.614 ; 227.298,147.614 227.298,147.614 ; 227.298,147.614 227.326,147.629 ccw(c227.256,147.762) 227.327,147.629 ccw(c227.257,147.762) 227.327,147.629 ; 227.327,147.629 ccw(c227.257,147.762) 227.327,147.629 ; 227.327,147.629 ccw(c227.257,147.762) 227.328,147.63 ; 227.328,147.63 227.356,147.644 ccw(c227.286,147.778) 227.356,147.645 ; 227.357,147.645 ccw(c227.288,147.779) 227.357,147.645 ; 227.356,147.645 227.357,147.645 ; 227.357,147.645 227.357,147.645 ; 227.357,147.645 227.386,147.66 ; 227.386,147.66 ccw(c227.317,147.794) 227.386,147.66 ; 227.386,147.66 ccw(c227.319,147.794) 227.387,147.66 227.415,147.675 ccw(c227.347,147.809) 227.416,147.675 ccw(c227.349,147.81) 227.416,147.675 ; 227.386,147.66 227.386,147.66 ; 227.386,147.66 227.386,147.66 ; 227.386,147.66 227.386,147.66 ; 227.416,147.675 227.416,147.675 ; 227.416,147.675 227.446,147.69 ; 227.446,147.69 ccw(c227.38,147.825) 227.446,147.69 ; 227.446,147.69 227.446,147.69 ; 227.446,147.69 227.475,147.704 227.475,147.704 ccw(c227.41,147.84) 227.476,147.704 227.506,147.719 227.536,147.733 ; 227.536,147.733 ccw(c227.473,147.87) 227.536,147.733 ; 227.536,147.733 ccw(c227.473,147.87) 227.536,147.733 ; 227.536,147.733 227.536,147.733 ; 227.536,147.733 227.566,147.746 ; 227.566,147.746 ccw(c227.504,147.883) 227.566,147.747 ; 227.566,147.747 ccw(c227.505,147.884) 227.567,147.747 227.595,147.759 ; 227.566,147.746 227.566,147.746 ; 227.566,147.747 227.566,147.747 ; 227.596,147.76 ccw(c227.535,147.897) 227.596,147.76 ; 227.596,147.76 ccw(c227.535,147.897) 227.596,147.76 ; 227.595,147.759 227.596,147.76 ; 227.596,147.76 ccw(c227.535,147.897) 227.596,147.76 ; 227.596,147.76 ccw(c227.535,147.897) 227.596,147.76 ; 227.596,147.76 ccw(c227.535,147.897) 227.596,147.76 ; 227.596,147.76 ccw(c227.537,147.898) 227.597,147.76 227.626,147.773 ccw(c227.566,147.911) 227.626,147.773 ccw(c227.566,147.911) 227.627,147.773 ; 227.596,147.76 227.596,147.76 ; 227.596,147.76 227.596,147.76 ; 227.627,147.773 ccw(c227.566,147.911) 227.627,147.773 ; 227.627,147.773 ccw(c227.568,147.912) 227.627,147.773 ; 227.627,147.773 ccw(c227.568,147.912) 227.627,147.773 ; 227.627,147.773 227.657,147.786 ; 227.657,147.786 ccw(c227.598,147.925) 227.657,147.786 ; 227.657,147.786 ccw(c227.598,147.925) 227.657,147.786 ; 227.657,147.786 ccw(c227.598,147.925) 227.657,147.786 ; 227.657,147.786 227.658,147.786 ; 227.658,147.786 227.658,147.787 ; 227.658,147.787 227.687,147.798 ; 227.687,147.798 ccw(c227.63,147.938) 227.687,147.799 ; 227.687,147.799 ccw(c227.63,147.938) 227.688,147.799 ; 227.688,147.799 ccw(c227.63,147.938) 227.688,147.799 ; 227.688,147.799 ccw(c227.63,147.938) 227.688,147.799 ; 227.688,147.799 ccw(c227.631,147.938) 227.688,147.799 ; 227.688,147.799 ccw(c227.63,147.938) 227.688,147.799 ; 227.688,147.799 227.719,147.811 227.749,147.823 ; 227.749,147.823 ccw(c227.695,147.964) 227.749,147.823 ; 227.749,147.823 227.78,147.835 ; 227.78,147.835 ccw(c227.728,147.976) 227.78,147.835 ; 227.78,147.835 ccw(c227.728,147.976) 227.78,147.835 ; 227.78,147.835 227.78,147.835 ; 227.78,147.835 227.78,147.835 ; 227.78,147.835 227.781,147.835 ; 227.781,147.835 227.811,147.847 ccw(c227.758,147.988) 227.811,147.847 ; 227.811,147.847 ccw(c227.758,147.988) 227.811,147.847 ; 227.811,147.847 ccw(c227.76,147.988) 227.811,147.847 ; 227.811,147.847 ccw(c227.76,147.988) 227.812,147.847 227.841,147.858 ; 227.841,147.858 ccw(c227.79,147.999) 227.842,147.858 ; 227.842,147.858 ccw(c227.791,147.999) 227.842,147.858 ; 227.842,147.858 ccw(c227.792,148) 227.842,147.858 ; 227.842,147.858 ccw(c227.79,147.999) 227.842,147.858 ; 227.842,147.858 ccw(c227.79,147.999) 227.842,147.858 ; 227.842,147.858 227.842,147.858 ; 227.842,147.858 227.842,147.858 ; 227.842,147.858 227.842,147.858 ; 227.842,147.858 227.873,147.869 227.905,147.88 227.936,147.891 ; 227.936,147.891 ccw(c227.889,148.034) 227.936,147.891 ; 227.936,147.891 ccw(c227.889,148.034) 227.936,147.891 ; 227.936,147.891 ccw(c227.888,148.033) 227.936,147.891 ; 227.936,147.891 227.936,147.891 ; 227.936,147.891 227.936,147.891 ; 227.936,147.891 227.936,147.891 ; 227.936,147.891 227.936,147.891 ; 227.936,147.891 227.967,147.901 ccw(c227.92,148.044) 227.967,147.901 227.999,147.911 ; 227.999,147.911 ccw(c227.955,148.055) 227.999,147.911 228.03,147.921 ; 227.999,147.911 227.999,147.911 ; 228.03,147.921 ccw(c227.985,148.064) 228.03,147.921 ; 228.03,147.921 ccw(c227.987,148.065) 228.03,147.921 ; 228.03,147.921 228.061,147.93 ; 228.061,147.93 ccw(c228.018,148.074) 228.062,147.93 ; 228.061,147.93 228.061,147.93 ; 228.062,147.93 228.062,147.93 ; 228.062,147.93 228.093,147.939 ; 228.093,147.939 ccw(c228.053,148.084) 228.093,147.939 ; 228.093,147.939 228.124,147.948 228.125,147.948 ; 228.125,147.948 ccw(c228.084,148.093) 228.125,147.948 ; 228.125,147.948 ccw(c228.084,148.093) 228.125,147.948 ; 228.125,147.948 228.125,147.948 ; 228.125,147.948 228.126,147.948 ; 228.126,147.948 228.156,147.957 ccw(c228.117,148.102) 228.156,147.957 ; 228.156,147.957 ccw(c228.117,148.102) 228.157,147.957 ; 228.157,147.957 ccw(c228.117,148.102) 228.157,147.957 ; 228.157,147.957 ccw(c228.117,148.102) 228.157,147.957 ; 228.157,147.957 ccw(c228.117,148.102) 228.157,147.957 ; 228.157,147.957 ccw(c228.117,148.102) 228.157,147.957 ; 228.156,147.957 ccw(c228.117,148.102) 228.157,147.957 ; 228.156,147.957 ccw(c228.119,148.102) 228.157,147.957 ; 228.157,147.957 ccw(c228.119,148.102) 228.157,147.957 ; 228.157,147.957 ccw(c228.119,148.102) 228.157,147.957 ; 228.157,147.957 ccw(c228.119,148.102) 228.157,147.957 228.188,147.965 ; 228.157,147.957 228.157,147.957 ; 228.156,147.957 228.156,147.957 ; 228.188,147.965 228.188,147.965 ; 228.188,147.965 228.188,147.965 ; 228.188,147.965 ccw(c228.15,148.11) 228.188,147.965 ; 228.188,147.965 ccw(c228.152,148.111) 228.188,147.965 ; 228.188,147.965 ccw(c228.152,148.111) 228.189,147.965 ; 228.189,147.965 228.219,147.973 ccw(c228.183,148.119) 228.22,147.973 ; 228.22,147.973 ccw(c228.183,148.119) 228.22,147.973 ; 228.22,147.973 ccw(c228.184,148.119) 228.22,147.973 ; 228.22,147.973 ccw(c228.184,148.119) 228.221,147.973 ; 228.221,147.973 228.221,147.973 ; 228.221,147.973 228.251,147.981 ; 228.251,147.981 ccw(c228.218,148.127) 228.252,147.981 ; 228.251,147.981 ccw(c228.218,148.127) 228.252,147.981 ; 228.251,147.981 ccw(c228.216,148.127) 228.251,147.981 ; 228.251,147.981 228.252,147.981 ; 228.251,147.981 ccw(c228.216,148.127) 228.252,147.981 ; 228.252,147.981 ccw(c228.216,148.127) 228.252,147.981 ; 228.252,147.981 ccw(c228.216,148.127) 228.252,147.981 ; 228.252,147.981 ccw(c228.216,148.127) 228.252,147.981 ; 228.252,147.981 ccw(c228.218,148.127) 228.252,147.981 ; 228.252,147.981 228.252,147.981 ; 228.251,147.981 228.252,147.981 ; 228.252,147.981 228.252,147.981 ; 228.252,147.981 228.284,147.988 ; 228.284,147.988 228.284,147.988 ; 228.284,147.988 228.284,147.988 ; 228.284,147.988 228.284,147.988 ; 228.284,147.988 228.284,147.988 ; 228.284,147.988 228.284,147.989 228.315,147.995 ; 228.315,147.995 ccw(c228.282,148.142) 228.316,147.996 ; 228.316,147.996 ccw(c228.282,148.142) 228.316,147.996 ; 228.316,147.996 ccw(c228.282,148.142) 228.316,147.996 ; 228.316,147.996 ccw(c228.282,148.142) 228.317,147.996 ; 228.316,147.996 ccw(c228.284,148.143) 228.317,147.996 ; 228.317,147.996 228.317,147.996 ; 228.316,147.996 228.316,147.996 ; 228.316,147.996 228.347,148.002 ; 228.347,148.002 ccw(c228.315,148.149) 228.347,148.002 ; 228.347,148.002 ccw(c228.315,148.149) 228.348,148.003 ; 228.348,148.003 ccw(c228.315,148.149) 228.348,148.003 ; 228.348,148.003 ccw(c228.315,148.149) 228.348,148.003 ; 228.348,148.003 ccw(c228.317,148.15) 228.348,148.003 ; 228.348,148.003 ccw(c228.317,148.15) 228.348,148.003 ; 228.348,148.003 228.348,148.003 ; 228.348,148.003 228.348,148.003 ; 228.348,148.003 228.38,148.009 228.412,148.015 ; 228.348,148.003 ccw(c228.317,148.15) 228.348,148.003 ; 228.348,148.003 ccw(c228.316,148.149) 228.348,148.003 ; 228.412,148.016 ccw(c228.384,148.163) 228.412,148.016 ; 228.412,148.015 228.412,148.016 ; 228.412,148.016 228.443,148.021 ; 228.443,148.021 ccw(c228.416,148.169) 228.444,148.022 ; 228.444,148.022 ccw(c228.416,148.169) 228.444,148.022 ; 228.444,148.022 ccw(c228.416,148.169) 228.445,148.022 ; 228.444,148.022 ccw(c228.418,148.17) 228.445,148.022 ; 228.444,148.022 228.445,148.022 ; 228.444,148.022 228.444,148.022 ; 228.445,148.022 ccw(c228.418,148.17) 228.445,148.022 ; 228.445,148.022 228.475,148.027 228.475,148.027 ; 228.475,148.027 228.476,148.027 ; 228.476,148.027 228.476,148.027 ; 228.476,148.027 ccw(c228.449,148.175) 228.477,148.028 ; 228.477,148.028 ccw(c228.449,148.175) 228.477,148.028 ; 228.477,148.028 ccw(c228.449,148.175) 228.477,148.028 ; 228.476,148.027 ccw(c228.449,148.175) 228.477,148.028 ; 228.477,148.028 228.477,148.028 ; 228.476,148.027 228.477,148.028 ; 228.477,148.028 228.508,148.033 ccw(c228.483,148.181) 228.508,148.033 228.54,148.038 ; 228.541,148.038 ccw(c228.518,148.187) 228.541,148.038 ; 228.54,148.038 228.541,148.038 ; 228.541,148.038 228.541,148.038 ; 228.541,148.038 228.572,148.043 ; 228.572,148.043 ccw(c228.549,148.192) 228.572,148.043 ; 228.572,148.043 ccw(c228.549,148.192) 228.573,148.043 228.605,148.048 ; 228.572,148.043 228.572,148.043 ; 228.572,148.043 228.572,148.043 ; 228.605,148.048 ccw(c228.585,148.197) 228.605,148.048 ; 228.605,148.048 ccw(c228.585,148.197) 228.606,148.048 228.636,148.052 ccw(c228.616,148.201) 228.637,148.052 ; 228.637,148.052 ccw(c228.618,148.201) 228.637,148.052 ; 228.637,148.052 228.637,148.052 ; 228.637,148.052 228.669,148.056 ; 228.669,148.056 228.669,148.056 ; 228.669,148.056 228.669,148.056 ; 228.669,148.056 ccw(c228.652,148.206) 228.669,148.056 ; 228.669,148.056 ccw(c228.652,148.206) 228.669,148.056 ; 228.669,148.056 ccw(c228.65,148.205) 228.669,148.056 ; 228.669,148.056 ccw(c228.652,148.206) 228.67,148.056 ; 228.67,148.056 228.701,148.06 ; 228.701,148.06 ccw(c228.684,148.209) 228.702,148.06 ; 228.701,148.06 228.701,148.06 ; 228.701,148.06 228.701,148.06 ; 228.702,148.06 ccw(c228.684,148.209) 228.702,148.06 ; 228.702,148.06 ccw(c228.684,148.209) 228.702,148.06 ; 228.702,148.06 ccw(c228.686,148.21) 228.702,148.06 ; 228.702,148.06 ccw(c228.686,148.21) 228.702,148.06 ; 228.702,148.06 228.702,148.06 ; 228.702,148.06 228.733,148.063 ; 228.733,148.063 ccw(c228.717,148.213) 228.733,148.063 ; 228.733,148.063 ccw(c228.717,148.213) 228.734,148.063 ; 228.734,148.063 228.734,148.064 228.766,148.067 228.798,148.07 ccw(c228.787,148.22) 228.799,148.07 ; 228.799,148.07 228.799,148.07 ; 228.799,148.07 228.83,148.072 ccw(c228.818,148.222) 228.831,148.072 ; 228.831,148.072 ccw(c228.818,148.222) 228.831,148.072 ; 228.831,148.072 ccw(c228.818,148.222) 228.831,148.072 ; 228.831,148.072 ccw(c228.818,148.222) 228.832,148.072 ; 228.832,148.072 ccw(c228.82,148.222) 228.832,148.072 ; 228.832,148.072 228.832,148.072 ; 228.832,148.072 228.832,148.072 228.862,148.075 ccw(c228.852,148.225) 228.863,148.075 ; 228.863,148.075 ccw(c228.852,148.225) 228.863,148.075 ; 228.863,148.075 ccw(c228.852,148.225) 228.863,148.075 ; 228.863,148.075 ccw(c228.852,148.225) 228.863,148.075 ; 228.863,148.075 ccw(c228.854,148.225) 228.864,148.075 228.895,148.077 ; 228.863,148.075 228.863,148.075 ; 228.895,148.077 ccw(c228.885,148.227) 228.895,148.077 ; 228.895,148.077 ccw(c228.885,148.227) 228.895,148.077 ; 228.895,148.077 ccw(c228.887,148.227) 228.895,148.077 ; 228.895,148.077 ccw(c228.887,148.227) 228.896,148.077 ; 228.896,148.077 ccw(c228.887,148.227) 228.896,148.077 ; 228.895,148.077 228.895,148.077 ; 228.896,148.077 228.896,148.077 ; 228.896,148.077 228.896,148.077 ; 228.896,148.077 228.927,148.078 ccw(c228.919,148.229) 228.928,148.079 ; 228.928,148.079 ccw(c228.921,148.229) 228.928,148.079 ; 228.928,148.079 ccw(c228.921,148.229) 228.929,148.079 ; 228.928,148.079 228.929,148.079 ; 228.928,148.079 228.959,148.08 ; 228.929,148.079 228.929,148.079 ; 228.959,148.08 ccw(c228.952,148.23) 228.96,148.08 ; 228.96,148.08 228.96,148.08 ; 228.96,148.08 ccw(c228.955,148.23) 228.961,148.08 ; 228.96,148.08 228.96,148.08 ; 228.961,148.08 228.992,148.081 ccw(c228.986,148.231) 228.992,148.081 229.024,148.082 229.057,148.083 ; 229.057,148.083 ccw(c229.055,148.233) 229.057,148.083 ; 229.057,148.083 ccw(c229.054,148.233) 229.057,148.083 ; 229.057,148.083 ccw(c229.054,148.233) 229.057,148.083 ; 229.057,148.083 229.057,148.083 ; 229.057,148.083 229.057,148.083 ; 229.057,148.083 229.075,148.083 ccw(c229.074,148.233) 229.078,148.083 ccw(c229.074,148.233) 229.078,148.083 ccw(c229.069,149.083) 229.091,148.083 ccw(c229.069,149.083) 229.55,148.206 ccw(c229.069,149.083) 229.551,148.207 ccw(c229.478,148.339) 229.552,148.207 ; 229.552,148.207 ccw(c212.687,178.876) 234.573,151.563 ; 229.552,148.207 229.552,148.207 ; 231.185,161.974 cw(c203.238,133.356) 231.186,161.973 ; 231.185,161.974 cw(c231.081,161.866) 231.187,161.973 ; 231.185,161.974 231.186,161.973 ; 231.186,161.973 cw(c230.487,161.258) 231.187,161.972 ; 231.186,161.973 cw(c231.082,161.864) 231.187,161.973 ; 231.186,161.973 231.186,161.973 ; 231.187,161.972 cw(c230.487,161.258) 231.353,161.759 cw(c231.224,161.68) 231.355,161.755 ; 231.187,161.972 ccw(c231.082,161.864) 231.187,161.973 ; 231.187,161.973 231.187,161.973 ; 231.187,161.973 231.187,161.972 ; 231.355,161.755 ccw(c234.164,163.381) 232.455,160.622 ccw(c234.164,163.381) 232.458,160.62 ; 231.355,161.755 ccw(c234.164,163.381) 231.355,161.755 ; 231.355,161.755 231.355,161.755 ; 232.458,160.62 cw(c232.382,160.49) 232.46,160.619 cw(c232.382,160.49) 232.461,160.618 cw(c231.933,159.769) 232.666,160.449 ; 232.458,160.62 ccw(c232.379,160.492) 232.458,160.62 ; 232.458,160.62 232.458,160.62 ; 232.666,160.449 cw(c232.556,160.346) 232.668,160.446 ; 232.667,160.448 ccw(c231.933,159.769) 232.666,160.449 ; 232.666,160.449 232.667,160.448 ; 232.668,160.446 cw(c203.238,133.356) 235.681,156.755 ; 232.668,160.446 ccw(c232.558,160.344) 232.668,160.446 ; 232.668,160.446 ccw(c232.556,160.346) 232.668,160.446 ; 234.573,151.563 ccw(c234.479,151.68) 234.573,151.563 ; 234.573,151.563 ccw(c234.479,151.68) 234.573,151.564 ; 234.573,151.563 ccw(c234.48,151.681) 234.574,151.564 ; 234.573,151.563 234.573,151.564 ; 234.574,151.564 ccw(c233.948,152.344) 234.92,152.11 ccw(c234.774,152.145) 234.921,152.112 ; 234.574,151.564 234.574,151.564 ; 234.921,152.112 234.921,152.112 ; 234.921,152.112 235.842,155.935 ; 235.681,156.755 cw(c235.559,156.666) 235.681,156.754 ; 235.681,156.755 cw(c203.238,133.356) 235.681,156.754 ; 235.681,156.755 ccw(c235.559,156.666) 235.681,156.755 ; 235.681,156.755 235.681,156.754 ; 235.681,156.755 235.681,156.755 ; 235.681,156.755 235.681,156.755 ; 235.682,156.753 cw(c234.87,156.169) 235.682,156.752 ; 235.682,156.753 ccw(c234.87,156.169) 235.681,156.754 ; 235.681,156.754 cw(c235.56,156.665) 235.682,156.752 ; 235.682,156.754 ccw(c235.559,156.666) 235.681,156.754 ; 235.681,156.754 ccw(c234.87,156.169) 235.681,156.754 ; 235.681,156.754 ccw(c235.56,156.665) 235.681,156.754 ; 235.681,156.754 ccw(c235.559,156.666) 235.681,156.754 ; 235.682,156.754 ccw(c235.56,156.665) 235.681,156.754 ; 235.681,156.754 ccw(c234.87,156.169) 235.681,156.754 ; 235.682,156.754 235.682,156.752 ; 235.681,156.754 235.681,156.754 ; 235.681,156.754 235.682,156.754 ; 235.681,156.754 235.681,156.754 ; 235.682,156.752 cw(c234.87,156.169) 235.87,156.169 cw(c234.87,156.169) 235.843,155.937 cw(c235.696,155.972) 235.842,155.935 ; 235.842,155.935 235.842,155.935

## Other copper
Top Layer:
  pour cut-out: 173.016,163.729 ccw(c173.616,163.729) 173.616,163.129 ccw(c173.616,163.729) 174.216,163.729 ccw(c173.616,163.729) 173.616,164.329 ccw(c173.616,163.729)

## Silkscreen, mask and mechanical layers (free items; w line width, h text height)
Top Overlay:
  text "RIGHT" at 222.075,151.525 h1.52 r0.5
Mechanical 4:
  drawing of 158 lines, arcs and shapes, not listed